# Altium PCB isolator.PcbDoc
Units mm, origin at the board's own origin, x right, y up, seen from the top; angles counter-clockwise.
Board outline 50 x 50 mm, 2 copper layers (Top Layer, Bottom Layer); 26 components, 60 nets, 153 pads, 45 vias.
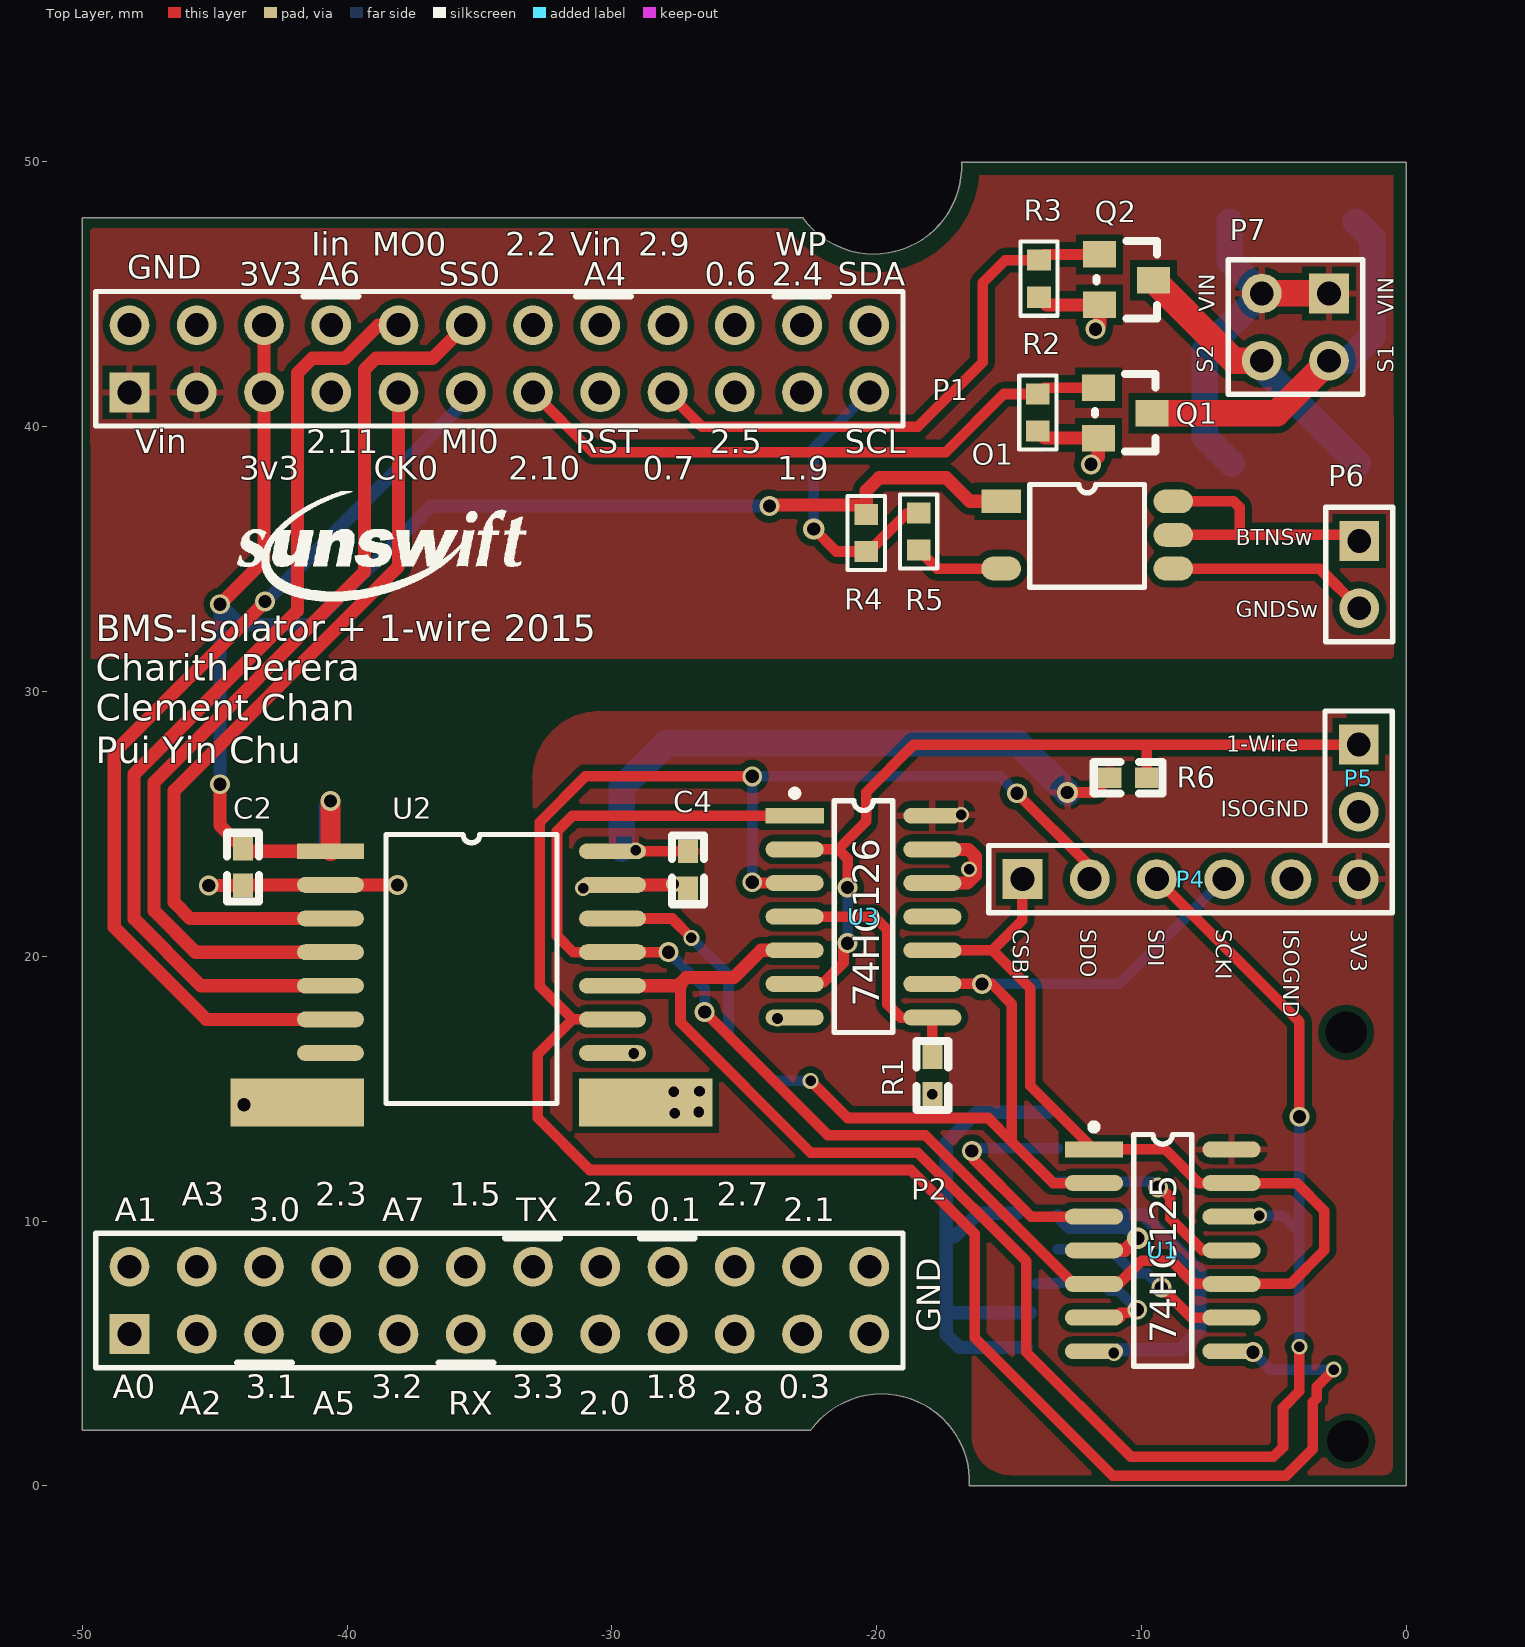
[diagram p0: Top Layer view]
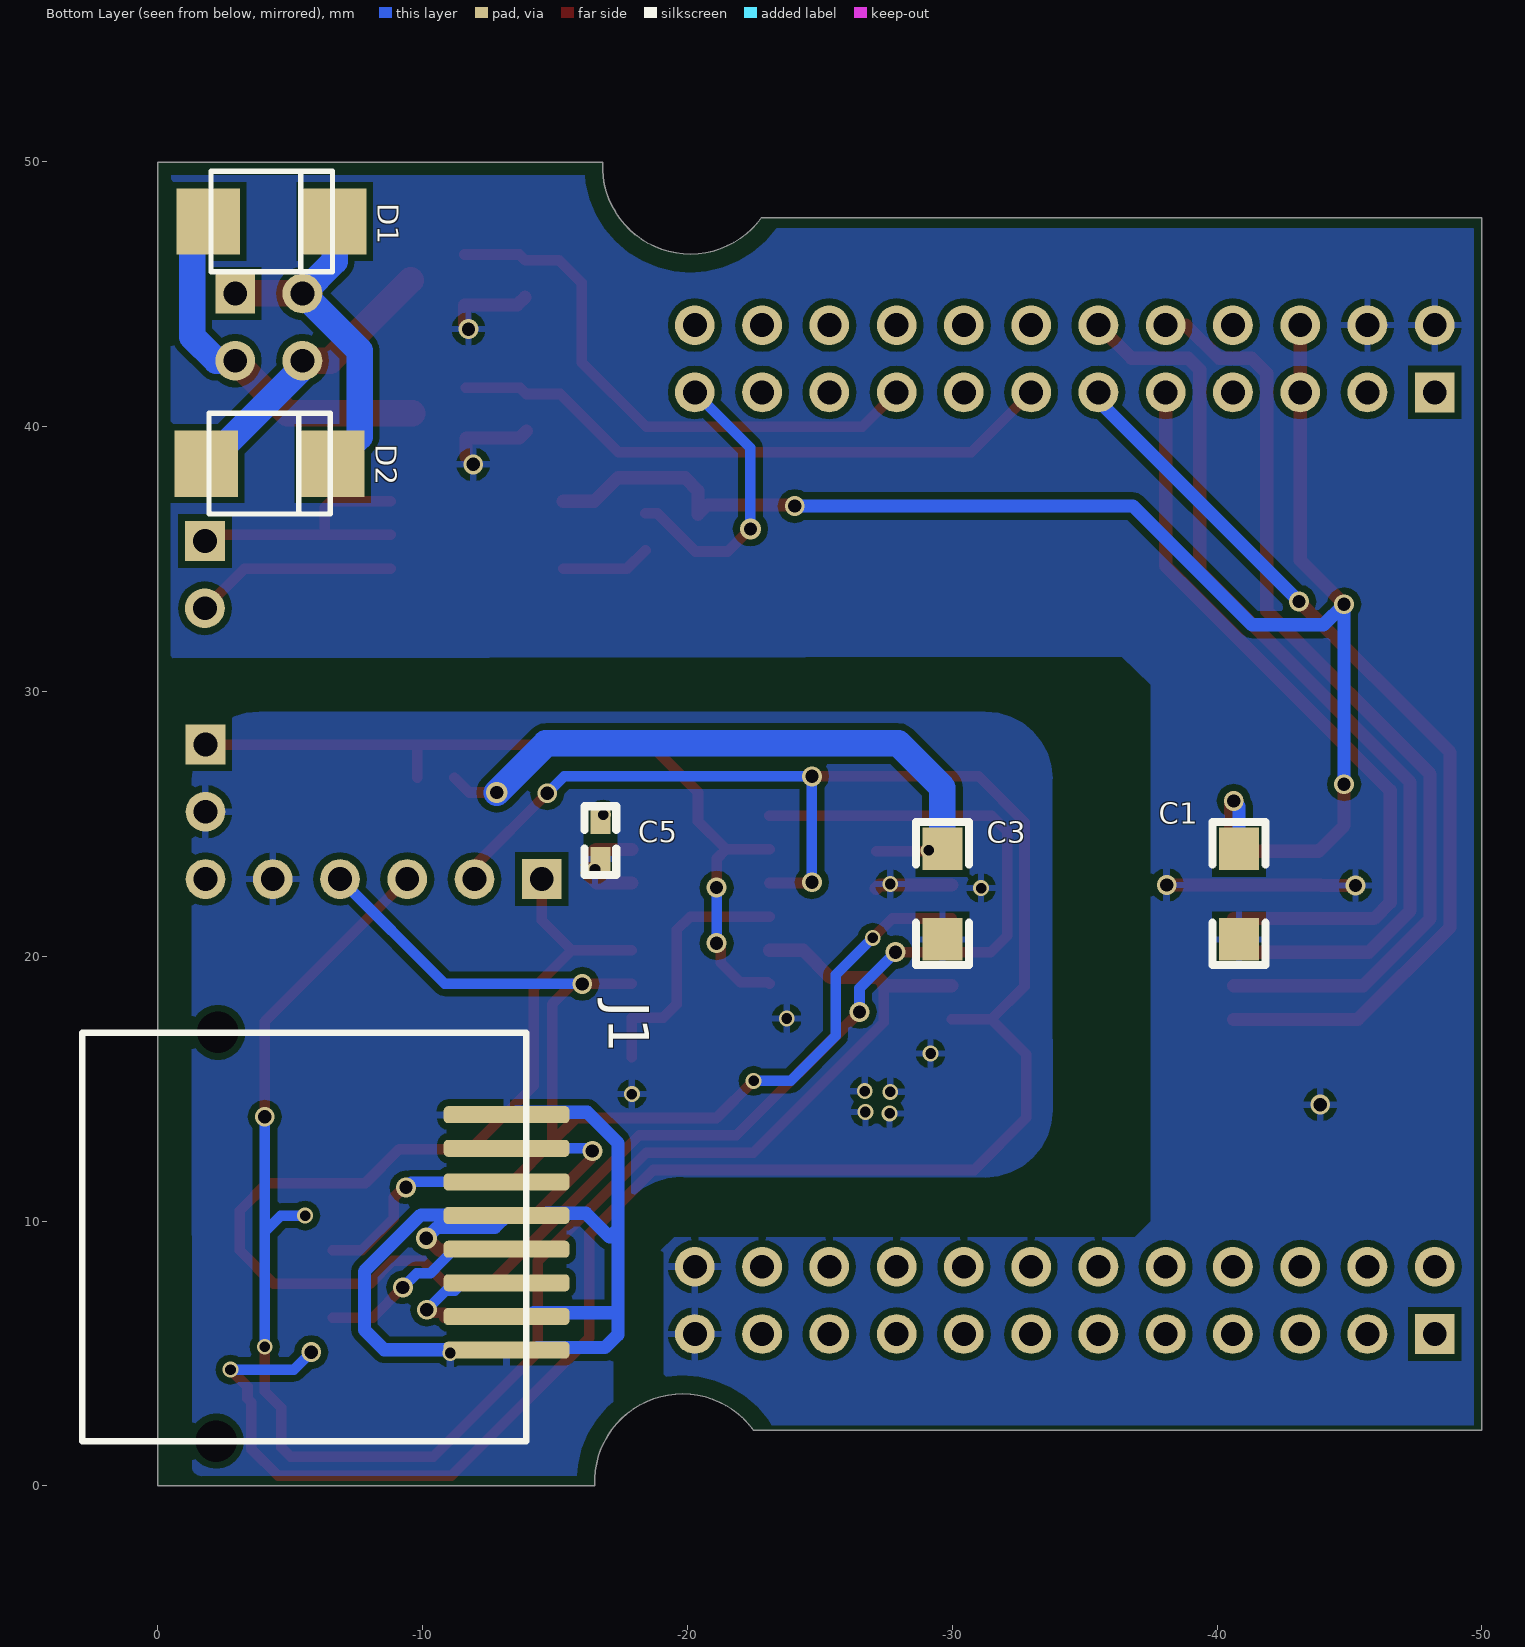
[diagram p1: Bottom Layer view, seen from below]

## Layer stack, top to bottom
Top Solder: solder mask 0.0102, Solder Resist, Dk 3.5
Top Layer: signal copper 0.0356
Dielectric1: dielectric 0.32, FR-4, Dk 4.8
Bottom Layer: signal copper 0.0356
Bottom Solder: solder mask 0.0102, Solder Resist, Dk 3.5

## Board outline
-50,2.099 -50,47.899 -22.8,47.899 -22.799,47.9 ccw(c-20.11,49.839) -16.799,49.994 -16.805,49.999 0,49.999 0,0 -16.505,0 -16.5,0.005 ccw(c-19.811,0.16) -22.5,2.099

## Design rules (kind name [scope] priority, off if disabled: settings)
Clearance [All] p1: gap=0.254
ComponentClearance [All] p1 off: gap=0.254 collisioncheckmode=3 verticalgap=0.254 showdistances=FALSE
MinimumSolderMaskSliver [All] p1 off: minsoldermaskwidth=0.254
PolygonConnect [All] p1: connectstyle=Relief reliefconductorwidth=0.254 reliefentries=4 polygonreliefangle="90 Angle" airgapwidth=0.254
RoutingVias [All] p1: holewidth=0.711 width=1.27 viastyle="Through Hole" minholewidth=0.3 minwidth=0.6 maxholewidth=0.711 maxwidth=1.27
SilkToSolderMaskClearance SilkscreenOverComponentPads [IsPad] p1 off: minsilkscreentomaskgap=0.254 clearancetoexposedcopper=TRUE
SolderMaskExpansion [All] p1: expansion=0.102
Width [All] p1: maxlimit=2 minlimit=0.2 preferedwidth=0.3
27 further rules are at their usual default settings.

## Components (designator, comment, footprint, x,y, rotation, side; value= is the part's Value field where it differs from the comment)
C1 "10uF 16v" 1206 -40.83,24.07 r270 bottom
C2 "100nF" 0603 -43.93,24.07 r270 top
C3 "10uF" 1206 -29.63,24.07 r270 bottom
C4 "100nF" 0603 -27.13,23.97 r270 top
C5 "100nF" 0603 -16.713,25.07 r270 bottom
D1 "D SCHOTTKY" SMB -4.293,47.752 r180 bottom
D2 "D SCHOTTKY" SMB -4.216,38.608 r180 bottom
J1 "8P8C-1PORT" 8P8C-1PORT -2.21,16.942 r270 bottom
O1 "VOM452T" VOM452T -16.053,37.236 r0 top
P1 "Header 12X2A" HDR2X12_CEN -48.22,41.299 r0 top locked
P2 "Header 12X2A" HDR2X12_CEN -48.22,5.739 r0 top locked
P4 "Header 6" HDR1X6 -14.5,22.92 r0 top
P5 "Header 2" HDR1X2 -1.8,28 r270 top
P6 "Header 2" HDR1X2 -1.778,35.687 r270 top
P7 "Header 2X2" HDR2X2 -2.921,45.034 r180 top
Q1 "ZXM61N02F" SOT23-3 -11.633,41.478 r270 top
Q2 "ZXM61N02F" SOT23-3 -11.582,46.507 r270 top
R1 "10k" 0603 -17.9,14.8 r90 top
R2 "R" 0603_M -13.919,40.538 r90 top
R3 "R" 0603_M -13.868,45.593 r90 top
R4 "R" 0603_M -20.396,35.992 r90 top
R5 "R" 0603_M -18.415,36.043 r270 top
R6 "4.7k" 0603 -9.804,26.746 r180 top
U1 "74HC125" SO14 -9.2,8.9 r270 top
U2 "ADuM5401" SOIC_W16 -40.63,23.97 r0 top
U3 "74HC126" SO14 -20.5,21.5 r270 top

## Footprints (in the part's own frame and the unit in brackets; to place one, negate y for a bottom-side part, rotate by r counter-clockwise, add the part's x,y. Pads: shape width x height; smd on the part's side, far side on the other; paste and mask are expansions set on the pad)
8P8C-1PORT [mm]
  rrect50% 0.64x4.75 smd: 1(2.92,10.96) 2(4.19,10.96) 3(5.46,10.96) 4(6.73,10.96) 5(8,10.96) 6(9.27,10.96) 7(10.54,10.96) 8(11.81,10.96)
  round 0 hole 1.57: ""(-0.19,0.06) ""(15.25,0)
  silkscreen extent -0.17,-5.06 15.25,11.7
0603 [mil] "Chip Inductor, Body 0.6x0.3mm, IPC High Density"
  rect 35.43x30 smd: 1(0,0) 2(55,0)
  silkscreen extent -24,-24 79,24
0603_M [mm] "Passive Component, Body 1.6x0.8mm, IPC Low Density"
  rect 0.8x0.9 smd: 1(-0.7,0) 2(0.7,0)
  silkscreen extent -1.4,-0.7 1.4,0.7, body extent -0.8,-0.4 0.8,0.4, height 0.9
1206 [mil]
  rect 62.99x60 smd: 1(0,0) 2(135,0)
  silkscreen extent -39,-39 173,39
HDR1X2 [mm] "Connector; Header; 2 Position"
  rect 1.5x1.5 hole 0.9: 1(0,0)
  round 1.5 hole 0.9: 2(2.54,0)
  silkscreen extent -1.27,-1.27 3.81,1.27
HDR1X6 [mm] "Connector; Header; 6 Position"
  rect 1.5x1.5 hole 0.9: 1(0,0)
  round 1.5 hole 0.9: 2(2.54,0) 3(5.08,0) 4(7.62,0) 5(10.16,0) 6(12.7,0)
  silkscreen extent -1.27,-1.27 13.97,1.27
HDR2X2 [mm] "Connector; Header; 2x2 Position"
  rect 1.5x1.5 hole 0.9: 1(0,0)
  round 1.5 hole 0.9: 2(0,2.54) 3(2.54,0) 4(2.54,2.54)
  silkscreen extent -1.27,-1.27 3.81,3.81
HDR2X12_CEN [mm] "Connector; Header; 12x2 Position"
  rect 1.5x1.5 hole 0.9: 1(0,0)
  round 1.5 hole 0.9: 2(2.54,0) 3(5.08,0) 4(7.62,0) 5(10.16,0) 6(12.7,0) 7(15.24,0) 8(17.78,0) 9(20.32,0) 10(22.86,0) 11(25.4,0) 12(27.94,0) 13(0,2.54) 14(2.54,2.54) 15(5.08,2.54) 16(7.62,2.54) 17(10.16,2.54) 18(12.7,2.54) 19(15.24,2.54) 20(17.78,2.54) 21(20.32,2.54) 22(22.86,2.54) 23(25.4,2.54) 24(27.94,2.54)
  silkscreen extent -1.27,-1.27 29.21,3.81
SMB [mm]
  rect 2.4x2.5 smd: A(-2.385,0) K(2.385,0)
  silkscreen extent -2.28,-1.9 2.3,1.9
SO14 [mm]
  rect 0.6x2.2 smd: 1(-3.81,-2.6)
  oval 0.6x2.2 smd: 2(-2.54,-2.6) 3(-1.27,-2.6) 4(0,-2.6) 5(1.27,-2.6) 6(2.54,-2.6) 7(3.81,-2.6) 8(3.81,2.6) 9(2.54,2.6) 10(1.27,2.6) 11(0,2.6) 12(-1.27,2.6) 13(-2.54,2.6) 14(-3.81,2.6)
  silkscreen extent -4.78,-2.72 4.38,1.1
SOIC_W16 [mm]
  rect 2.52x0.6 smd: 1(0,0)
  oval 2.52x0.6 smd: 2(0,-1.27) 3(0,-2.54) 4(0,-3.81) 5(0,-5.08) 6(0,-6.35) 7(0,-7.62) 10(10.65,-7.62) 11(10.65,-6.35) 12(10.65,-5.08) 13(10.65,-3.81) 14(10.65,-2.54) 15(10.65,-1.27) 16(10.65,0)
  rect 5.04x1.8 smd: 8(-1.26,-9.49) 9(11.91,-9.49)
  silkscreen extent 2.09,-9.53 8.55,0.64
SOT23-3 [mm]
  rect 1x1.25 smd: 1(0,0) 2(1.905,0) 3(0.965,2.032)
  silkscreen extent -0.51,-0.13 2.41,2.16
VOM452T [mm]
  rect 1.5x0.9 smd: 1(0.75,-0.05)
  oval 1.5x0.9 smd: 3(0.75,-2.59) 4(7.25,-2.59) 5(7.25,-1.32) 6(7.25,-0.05)
  silkscreen extent 1.84,-3.3 6.16,0.59

## Part data
C1 C2 C3 C4 C5: library part CAP, "Capacitor"
D1 D2: "Schottky Diode"
P1 P2: "Header, 12-Pin, Dual row"
P4: "Header, 6-Pin"
P5 P6: "Header, 2-Pin"
P7: "Header, 2-Pin, Dual row"
Q1 Q2: "1.7A, 20V N-Channel Enhancement mode FET"
R1 R6: library part RES1, "Resistor"
R2 R3 R4 R5: "Resistor"
U1: library part SN74HC125, "buffer tri-state non-inv low-oe"
U2: "Isolator w/ DCDC"
U3: library part SN74HC126, "buffer tri-state non-inv high-oe"

## Via types
v1: diameter 0.75, hole 0.5, Top Layer to Bottom Layer, 24 vias
v2: diameter 0.6, hole 0.4, Top Layer to Bottom Layer, 18 vias
v3: diameter 0.8, hole 0.5, Top Layer to Bottom Layer, 3 vias

## Nets (pads, with @x,y where several pads share a name; then routed paths per layer and width w, separated by ;. In a path a pad name is that pad's centre, name@x,y a point inside that pad or via, vN(x,y) a via of type N, cw(c..) or ccw(c..) an arc to the next point about the centre after c; other vN are vias at no path point)
3V3: C1.1 C2.1 O1.1 P1.3 P1.15 R4.2 U2.1 | length 61.3
  Top Layer w0.5: v1(-44.8,26.5) -44.8,24.94 C2.1 -43.83,23.97 U2.1 ; v1(-44.8,33.3) -43.14,34.96 P1.3 P1.15 ; v1(-24.054,37.008) -24.013,37.048 -20.753,37.048 R4.2 -20.396,37.592 -19.914,38.075 -17.374,38.075 -16.485,37.186 O1.1
  Top Layer w0.75: U2.1 v1(-40.63,25.87)
  Bottom Layer w0.5: v1(-44.8,26.5) v1(-44.8,33.3) -44.021,32.521 -41.317,32.521 -36.83,37.008 v1(-24.054,37.008) ; C1.1 -40.83,25.67 v1(-40.63,25.87)
CAN_GND: C1.2 C2.2 P1.13 P1.14 P2.12 P2.24 Q1.2 Q2.2 R2.1 R3.1 U2.2 U2.8 | length 14
  Top Layer w0.5: v1(-45.227,22.673) C2.2 -43.903,22.7 U2.2 v1(-38.1,22.7) ; R2.1 -13.654,39.573 Q1.2 -11.633,38.862 v1(-11.913,38.583) ; R3.1 -13.578,44.602 Q2.2 -11.582,43.84 v1(-11.735,43.688)
  other v1: -43.9,14.4
CSBI_ISO_LPC: P4.1 U1.1 U1.5 U1.10 U1.13 U2.13 U3.1 U3.10 | length 74.9
  Top Layer w0.4: v1(-27.86,20.16) U2.13 -31.46,20.16 -32.075,20.775 -32.075,24.725 -31.49,25.31 U3.1 ; v1(-26.5,17.9) -21.842,13.242 -18.174,13.242 -12.562,7.63 U1.5 -10.87,7.63 -10,8.5 -8.87,8.5 -8,7.63 U1.10 -4.37,7.63 -3.1,8.9 -3.1,10.4 -4.14,11.44 U1.13 -7.84,11.44 -9.11,12.71 U1.1 -14.2,15.11 -14.2,18.8 -15.63,20.23 ; U3.10 -15.63,20.23 ; P4.1 -14.5,21.36 -15.63,20.23
  Bottom Layer w0.4: v1(-27.86,20.16) -26.5,18.8 v1@-26.5,18.1
CSBI_LTC: J1.6 U1.6 | length 6.3
  Top Layer w0.4: U1.6 -10.81,6.36 -10.81,6.538 -10.17,6.538 -10.16,6.548 v1(-10.16,6.655)
  Bottom Layer w0.4: J1.6@-13.957,7.646 J1.6@-13.17,7.646 ; J1.6 -11.507,7.672 -11.207,7.372 -10.878,7.372 v1(-10.16,6.655) ; v1@-10.211,6.528 v1@-10.211,6.686
EEPROM_WP: P1.23
ISO3V3: C3.1 C4.1 C5.1 P4.6 R6.2 U1.14 U2.16 U3.14 | length 25.3
  Top Layer w0.4: U2.16 C4.1 ; v3(-12.802,26.187) -11.76,26.187 R6.2
  Bottom Layer w1: C3.1 -29.63,26.377 -27.965,28.042 -14.656,28.042 v3(-12.802,26.187)
  other v2: -29.108,24.003 -16.815,25.349
ISO_GND: C3.2 C4.2 C5.2 J1.1 J1.4 J1.7 J1.8 P4.5 P5.2 R1.1 U1.4 U1.7 U2.9 U2.10 U2.15 U3.7 U3.12 U3.13 | length 44.5
  Top Layer w0.5: U2.15 -27.257,22.7 C4.2 ; U3.12 -16.575,22.77 -16.281,23.063 -16.281,23.774 -16.547,24.04 U3.13 ; U1.4 -10.633,8.9 -10.179,9.354 v3(-10.141,9.354)
  Bottom Layer w0.5: -17.323,6.543 J1.7@-14.199,6.543 ; J1.4@-14.681,10.302 -16.165,10.302 -17.069,9.398 -17.374,9.703 ; J1.8@-14.351,5.232 -16.891,5.232 -17.374,5.715 -17.374,9.703 ; J1.1@-13.526,14.112 -16.216,14.112 -17.374,12.954 -17.374,9.703 ; J1.4 -12.724,9.766 -10.553,9.766 v3(-10.141,9.354) ; J1.4@-12.382,10.237 -9.937,10.237 -7.8,8.1 -7.8,5.9 -8.552,5.148 J1.8@-10.917,5.148
  other v2: -11.044,5.021 -27.635,14.072 -26.721,14.122 -17.9,14.8 -27.661,14.884 -26.695,14.91 -29.185,16.332 -23.749,17.653 -31.09,22.581 -27.661,22.733 -16.51,23.292
NetO1_3: O1.3 R5.2 | length 3.4
  Top Layer w0.4: R5.2 -17.719,34.646 O1.3
NetO1_4: O1.4 P6.2 | length 7.6
  Top Layer w0.4: O1.4 -3.277,34.646 P6.2
NetO1_5: O1.5 O1.6 P6.1 | length 10.8
  Top Layer w0.4: O1.5 -6.299,35.916 ; O1.6 -6.529,37.186 -6.299,36.957 -6.299,35.916 ; P6.1 -2.007,35.916 -6.299,35.916
ONEWIRE_DATA: P5.1 R6.1 U3.2 U3.6 | length 31.6
  Top Layer w0.4: U3.6 -23.038,19.022 -22,19.022 -21.256,19.766 v1@-21.256,20.5 ; U3.2 -21.46,24.04 ; v1@-21.156,22.6 v1(-21.1,22.6) -21.1,23.68 -21.46,24.04 ; R6.1 -9.804,28 ; P5.1 -9.804,28 ; -21.46,24.04 -20.4,25.1 -20.4,26.2 -18.6,28 -9.804,28
  Bottom Layer w0.4: v1@-21.156,22.6 v1(-21.1,22.6) v1(-21.1,20.5)
ONEWIRE_TX_ENA: R1.2 U3.4 U3.8 | length 9.9
  Top Layer w0.4: U3.4 -20.1,21.5 -19.6,21 -19.6,18.2 -19.09,17.69 U3.8 R1.2
"PIO 0.1/CLKOUT": P2.21
"PIO 0.2/SSEL0": P1.18 U2.4 | length 35.6
  Top Layer w0.5: U2.4 -45.727,20.16 -47.292,21.725 -47.292,26.575 -39.346,34.521 -39.346,42.154 -38.915,42.585 -36.774,42.585 P1.18
"PIO 0.3": P2.11
"PIO 0.4/SCL": P1.12 R4.1 R5.1 | length 10.9
  Top Layer w0.4: v3(-22.377,36.144) -21.525,35.292 R4.1 -20.304,35.292 -18.853,36.743 R5.1
  Bottom Layer w0.4: v3(-22.377,36.144) -22.377,39.202 P1.12
"PIO 0.5/SDA": P1.24
"PIO 0.6": P1.22
"PIO 0.7": P1.9 Q2.1 R3.2 | length 21.3
  Top Layer w0.4: P1.9 -26.6,39.999 -18.446,39.999 -16.002,42.443 -16.002,45.441 -15.15,46.293 R3.2 -13.654,46.507 Q2.1
"PIO 0.8/MISO0": P1.6 U2.6 | length 35.3
  Top Layer w0.5: v1(-43.1,33.4) -48.8,27.7 -48.8,21.1 -45.32,17.62 U2.6
  Bottom Layer w0.5: v1(-43.1,33.4) -35.52,40.98 P1.6
"PIO 0.9/MOSI0": P1.17 U2.5 | length 36.2
  Top Layer w0.5: U2.5 -45.524,18.89 -48.046,21.412 -48.046,26.888 -41.877,33.057 -41.877,42.023 -41.315,42.585 -40.081,42.585 -38.827,43.839 P1.17
"PIO 0.10/SCK0": P1.5 U2.3 | length 28.9
  Top Layer w0.5: U2.3 -45.931,21.43 -46.538,22.037 -46.538,26.263 -38.06,34.741 P1.5
"PIO 0.11/ADC0": P2.1
"PIO 1.0/ADC1": P2.13
"PIO 1.1/ADC2": P2.2
"PIO 1.2/ADC3": P2.14
"PIO 1.3/ADC4": P1.20
"PIO 1.4/ADC5/WAKEUP": P2.4
"PIO 1.5": P2.18
"PIO 1.6/RX": P2.6
"PIO 1.7/TX": P2.19
"PIO 1.8": P2.9
"PIO 1.9": P1.11
"PIO 1.10/ADC6": P1.16
"PIO 1.11/ADC7": P2.17
"PIO 2.0/SSEL1": P2.8
"PIO 2.1/SCK1": P2.23
"PIO 2.2/MISO1": P1.19
"PIO 2.3/MOSI1": P2.16
"PIO 2.5": P1.10
"PIO 2.6": P2.20
"PIO 2.7": P2.22
"PIO 2.8": P2.10
"PIO 2.9": P1.21
"PIO 2.10": P1.7 Q1.1 R2.2 | length 23.3
  Top Layer w0.4: P1.7 -30.724,39.043 -17.396,39.043 -15.2,41.238 R2.2 -13.679,41.478 Q1.1
"PIO 2.11": P1.4
"PIO 3.0": P2.15
"PIO 3.1": P2.3
"PIO 3.2": P2.5
"PIO 3.3": P2.7
R\E\S\E\T\: P1.8
S1_L: D1.A P7.2 Q1.3 | length 14.1
  Top Layer w1: Q1.3 -4.902,40.513 P7.2
  Bottom Layer w1: P7.2 -2.21,42.494 -1.295,43.409 -1.295,47.14 D1.A
S2_L: D2.A P7.4 Q2.3 | length 10.7
  Top Layer w1: Q2.3 -6.502,42.494 P7.4
  Bottom Layer w1: P7.4 -5.461,42.238 D2.A
SCKI_ISO_LPC: P4.4 U1.2 U2.14 U3.9 | length 43
  Top Layer w0.4: U2.14 -27.73,21.43 v2(-27,20.7) ; v2(-22.5,15.3) -21.096,13.896 -15.796,13.896 -14.9,13 ; U3.9 v1(-16.027,18.96) -15.66,18.96 -14.9,18.2 -14.9,13 ; U1.2 -13.34,11.44 -14.9,13
  Bottom Layer w0.4: v2(-27,20.7) -25.6,19.3 -25.6,17 -23.9,15.3 v2(-22.5,15.3) ; v1(-16.027,18.96) -10.84,18.96 P4.4
SCKI_LTC: J1.2 U1.3 | length 9.1
  Top Layer w0.4: v1(-16.408,12.649) -16.345,12.586 -16.345,12.347 -14.168,10.17 U1.3
  Bottom Layer w0.4: v1(-16.408,12.649) -16.306,12.752 J1.2
SDI_ISO_LPC: P4.3 U1.12 U2.12 U3.5 | length 66.3
  Top Layer w0.4: -27.41,18.99 -27.41,17.51 -22.488,12.588 -18.445,12.588 -14.351,8.494 -14.351,5.051 -10.4,1.1 -5.021,1.1 -4.659,1.462 -4.659,2.961 -4.039,3.581 v2(-4.039,5.258) ; P4.3 -4.039,17.539 v1(-4.039,13.945)
  Top Layer w0.5: U2.12 -27.41,18.89 ; -27.41,18.99 -27.2,19.2 -25.4,19.2 -24.37,20.23 U3.5
  Bottom Layer w0.4: v2(-5.563,10.211) -4.648,10.211 -4.039,9.601 ; v2(-4.039,5.258) -4.039,9.601 ; v1(-4.039,13.945) -4.039,9.601
SDI_LTC: J1.3 U1.11 | length 8.1
  Top Layer w0.4: v1(-9.373,11.278) -9.296,11.278 -8.915,10.897 -8.915,10.115 -7.7,8.9 U1.11
  Bottom Layer w0.4: J1.3 -9.577,11.482 v1(-9.373,11.278)
SDO_ISO_LPC: P4.2 U1.8 U2.11 U3.3 | length 87
  Top Layer w0.4: U2.11 -31.48,17.62 ; v1(-24.7,22.8) -24.67,22.77 U3.3 ; v1(-24.7,26.8) -31,26.8 -32.729,25.071 -32.729,18.869 -31.48,17.62 ; v1(-14.707,26.162) -11.96,23.415 P4.2 ; v2(-2.743,4.394) -3.385,3.753 -3.385,3.311 -3.531,3.165 -3.531,1.397 -4.547,0.381 -11.081,0.381 -16.3,5.6 -16.3,9.518 -18.716,11.934 -30.834,11.934 -32.8,13.9 -32.8,16.3 -31.48,17.62
  Bottom Layer w0.4: v1(-24.7,22.8) v1(-24.7,26.8) -15.345,26.8 v1(-14.707,26.162) ; v1(-5.791,5.055) -5.131,4.394 v2(-2.743,4.394)
SDO_LTC: J1.5 U1.9 | length 7.6
  Top Layer w0.4: v1(-9.253,7.5) -8.113,6.36 U1.9
  Bottom Layer w0.4: J1.5 -11.196,8.942 -10.7,8.446 -10.281,8.026 -9.779,8.026 v1(-9.253,7.5)
VIN: D1.K D2.K P1.1 P1.2 P7.1 P7.3 | length 13.5
  Top Layer w1: P7.3 P7.1
  Bottom Layer w1: D1.K -6.678,46.251 P7.3 -7.62,42.875 -7.62,39.627 D2.K
pads on no net: J1. U2.7 U3.11

## Polygon pours and split planes (outlines as drawn)
ISO3V3 on Top Layer "TOP" (solid, pour order 8): -0.508,0.381 -0.508,26.721 ccw(c-3.048,26.721) -3.048,29.261 -5.639,29.261 -30.455,29.261 ccw(c-30.455,26.721) -32.995,26.721 -32.995,19.609 -32.995,14.224 ccw(c-30.455,14.224) -30.455,11.684 -19.075,11.684 -18.948,11.684 cw(c-18.948,9.144) -16.408,9.144 -16.408,2.565 -16.408,1.905 ccw(c-14.91,1.905) -14.91,0.406 -0.864,0.406 ccw(c-0.864,0.762) -0.508,0.762
VIN on Top Layer "GND_Plane" (solid, remove dead copper, pour order 5): -49.7,47.5 -19.2,47.5 -17.4,49.5 -0.5,49.5 -0.483,31.242 -49.682,31.242
CAN_GND on Bottom Layer "GND_Plane" (solid, remove dead copper, pour order 6): -49.7,47.48 -49.68,47.5 -20.1,47.5 -18.1,49.5 -0.5,49.5 -0.483,31.267 -36.398,31.318 -37.49,30.251 -37.5,10 -36.9,9.4 -19.5,9.4 -19,8.9 -19.1,8.8 -19.1,3.7 -21.2,3.7 -22.6,2.3 -49.7,2.3
ISO_GND on Bottom Layer "BOT" (solid, pour order 7): -1.295,0.356 -1.295,26.695 ccw(c-3.835,26.695) -3.835,29.235 -6.426,29.235 -31.242,29.235 ccw(c-31.242,26.695) -33.782,26.695 -33.782,19.583 -33.782,14.199 ccw(c-31.242,14.199) -31.242,11.659 -19.863,11.659 -19.736,11.659 cw(c-19.736,9.119) -17.196,9.119 -17.196,2.54 -17.196,1.88 ccw(c-15.697,1.88) -15.697,0.381 -1.651,0.381 ccw(c-1.651,0.737) -1.295,0.737

## Other copper
Top Layer:
  pour cut-out: -24.111,49.838 ccw(c-20.111,49.838) -20.111,45.838 ccw(c-20.111,49.838) -16.111,49.838 ccw(c-20.111,49.838) -20.111,53.838 ccw(c-20.111,49.838)
Bottom Layer:
  pour cut-out: -23.813,0.161 cw(c-19.813,0.161) -19.813,4.161 cw(c-19.813,0.161) -15.813,0.161 cw(c-19.813,0.161) -19.813,-3.839 cw(c-19.813,0.161)
  pour cut-out: -24.111,49.838 ccw(c-20.111,49.838) -20.111,45.838 ccw(c-20.111,49.838) -16.111,49.838 ccw(c-20.111,49.838) -20.111,53.838 ccw(c-20.111,49.838)

## Silkscreen, mask and mechanical layers (free items; w line width, h text height)
Top Overlay:
  drawing of 1666 lines, arcs and shapes, not listed
  text "Iin" at -41.357,46.46 h0.9
  text "MO0" at -39.051,46.46 h0.9
  text "2.2" at -34.028,46.46 h0.9
  text "Vin" at -31.578,46.46 h0.9
  text "2.9" at -29.004,46.46 h0.9
  text "WP" at -23.831,46.46 h0.9
  text "GND" at -48.3,45.6 h0.9
  text "3V3" at -44.075,45.317 h0.9
  text "A6" at -41.103,45.317 h0.9
  text "SS0" at -36.539,45.317 h0.9
  text "A4" at -31.07,45.317 h0.9
  text "0.6" at -26.492,45.317 h0.9
  text "2.4" at -23.958,45.317 h0.9
  text "SDA" at -21.469,45.317 h0.9
  text "VIN" at -7.239,44.348 h0.6 r90
  text "VIN" at -0.483,44.221 h0.6 r90
  text "S2" at -7.29,42.037 h0.6 r90
  text "S1" at -0.483,42.037 h0.6 r90
  text "Vin" at -48.012,38.992 h0.9
  text "2.11" at -41.539,38.992 h0.9
  text "MI0" at -36.458,38.992 h0.9
  text "RST" at -31.377,38.992 h0.9
  text "2.5" at -26.296,38.992 h0.9
  text "SCL" at -21.215,38.992 h0.9
  text "3v3" at -44.08,37.993 h0.9
  text "CK0" at -38.999,37.993 h0.9
  text "2.10" at -33.918,37.993 h0.9
  text "0.7" at -28.836,37.993 h0.9
  text "1.9" at -23.755,37.993 h0.9
  text "BTNSw" at -6.452,35.535 h0.6
  text "GNDSw" at -6.452,32.817 h0.6
  text "BMS-Isolator + 1-wire 2015" at -49.5,31.9 h1
  text "Charith Perera" at -49.5,30.4 h1
  text "Clement Chan" at -49.5,28.9 h1
  text "1-Wire" at -6.8,27.72 h0.6
  text "Pui Yin Chu" at -49.5,27.3 h1
  text "ISOGND" at -7,25.268 h0.6
  text "CSBI" at -14.86,21.02 h0.6 r270
  text "SDO" at -12.308,21.02 h0.6 r270
  text "SDI" at -9.756,21.02 h0.6 r270
  text "SCKI" at -7.204,21.02 h0.6 r270
  text "ISOGND" at -4.652,21.02 h0.6 r270
  text "3V3" at -2.1,21.02 h0.6 r270
  text "A3" at -46.245,10.584 h0.9
  text "2.3" at -41.196,10.584 h0.9
  text "1.5" at -36.147,10.584 h0.9
  text "2.6" at -31.097,10.584 h0.9
  text "2.7" at -26.048,10.584 h0.9
  text "A1" at -48.77,10.005 h0.9
  text "3.0" at -43.721,10.005 h0.9
  text "A7" at -38.671,10.005 h0.9
  text "TX" at -33.622,10.005 h0.9
  text "0.1" at -28.572,10.005 h0.9
  text "2.1" at -23.523,10.005 h0.9
  text "GND" at -17.6,5.8 h0.9 r90
  text "A0" at -48.85,3.322 h0.9
  text "3.1" at -43.821,3.322 h0.9
  text "3.2" at -39.092,3.322 h0.9
  text "3.3" at -33.762,3.322 h0.9
  text "1.8" at -28.733,3.322 h0.9
  text "0.3" at -23.704,3.322 h0.9
  text "A2" at -46.335,2.687 h0.9
  text "A5" at -41.306,2.687 h0.9
  text "RX" at -36.177,2.687 h0.9
  text "2.0" at -31.248,2.687 h0.9
  text "2.8" at -26.219,2.687 h0.9
Mechanical 1:
  lines w0.2: -22.8,47.899 -50,47.899 -50,2.099 -22.5,2.099 cw(c-19.811,0.16) -16.5,0.005 ; -22.799,47.9 ccw(c-20.11,49.839) -16.799,49.994 ; -16.805,49.999 0,49.999 0,0 -16.505,0